# Altium PCB 6C-2L-1550um.PcbDoc (part 1 of 2)
Units mm, origin at the board's own origin, x right, y up, seen from the top; angles counter-clockwise.
Board outline 276.61 x 39.37 mm, 2 copper layers (Top Layer, Bottom Layer), stack 1.586 mm thick; 147 components, 157 nets, 749 pads, 307 vias.
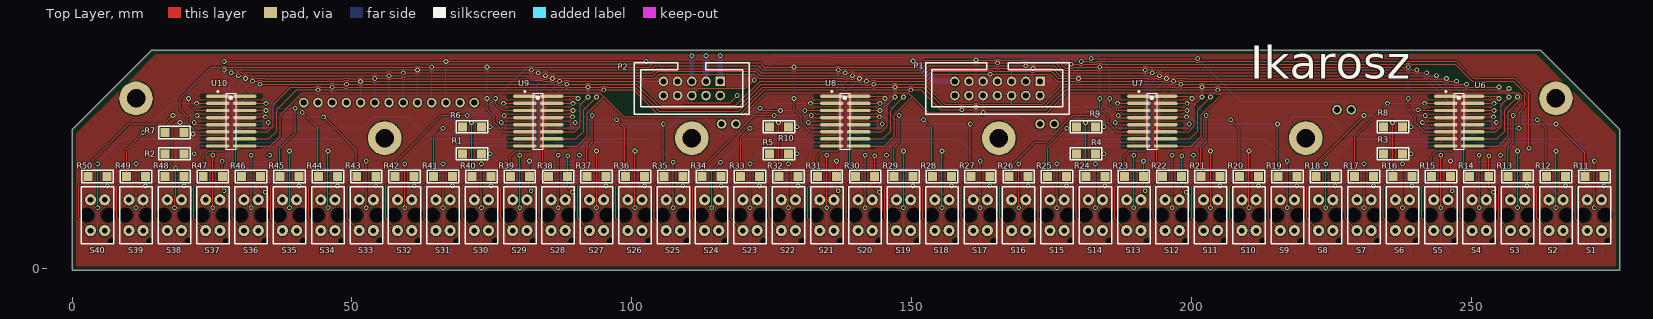
[diagram p0: Top Layer view]
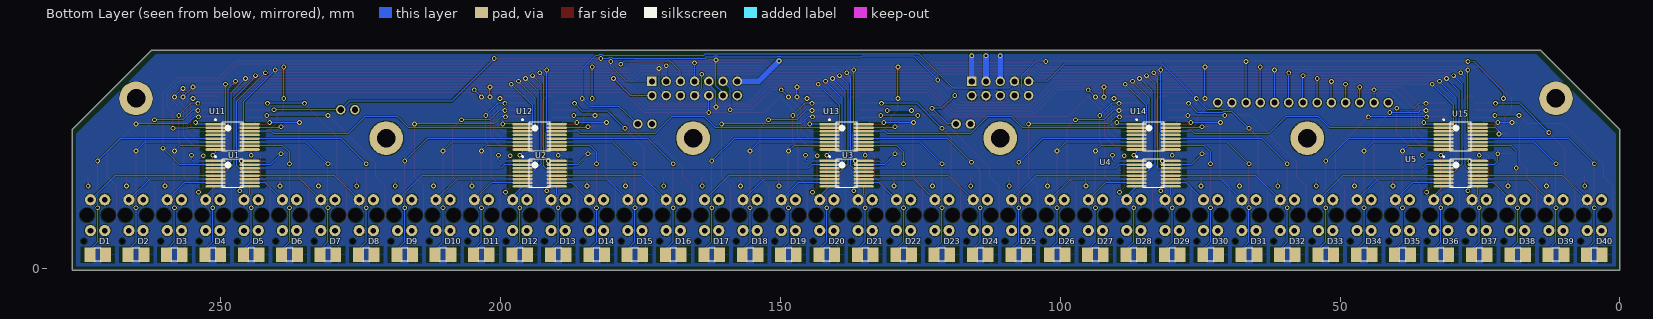
[diagram p1: Bottom Layer view, seen from below]
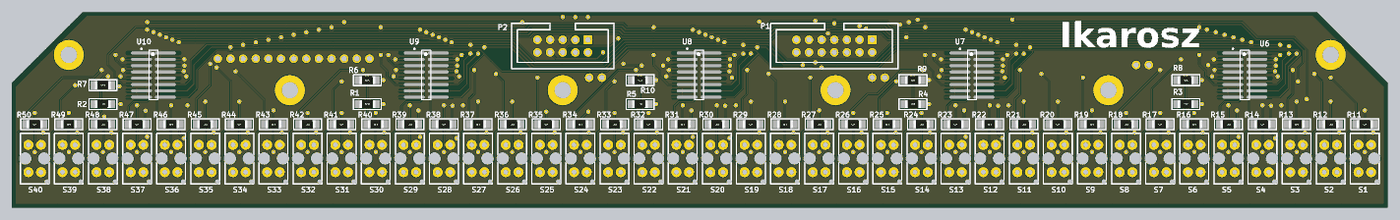
[diagram p3: 3D render of the assembled board from above, using the file's embedded part models]

## Layer stack, top to bottom
Top Solder: solder mask 0.0102, Solder Resist, Dk 3.5
Top Layer: signal copper 0.018
Dielectric1: core 1.55, FR-4, Dk 4.8
Bottom Layer: signal copper 0.018
Bottom Solder: solder mask 0.0102, Solder Resist, Dk 3.5

## Board outline
0,-0.254 276.606,-0.254 276.606,24.892 262.382,39.116 14.224,39.116 0,24.892

## Design rules (kind name [scope] priority, off if disabled: settings)
BoardOutlineClearance [All] p1: gap=0.25 ignorepadtopadclearanceinfootprint=FALSE except(0: Arc-SplitContinuation Track-SplitContinuation SMDPad-SplitContinuation THPad-SplitContinuation Via-SplitContinuation Fill-SplitContinuation Poly-SplitContinuation Region-SplitContinuation Text-SplitContinuation)
Clearance Clearance-xPP-xTP-xTT [All] p1: gap=0.15 ignorepadtopadclearanceinfootprint=FALSE except(0: Arc-Hole Track-Hole SMDPad-Hole THPad-Hole Via-Hole Fill-Hole Poly-Hole Region-Hole Text-Hole)
ComponentClearance [All] p1: gap=0.25 collisioncheckmode=3 verticalgap=0.25 showdistances=FALSE
DiffPairsRouting [All] p1: maxlimit=0.25 minlimit=0.25 mostfreqgap=0.25 toplayer_minwidth=0.381 toplayer_maxwidth=0.381 toplayer_prefwidth=0.381 bottomlayer_minwidth=0.381 bottomlayer_maxwidth=0.381 bottomlayer_prefwidth=0.381 maxuncoupledlength=12.5
Height [All] p1: minheight=0 maxheight=25 prefheight=12.5
HoleSize HoleSize-PTH [All] p1: absolutevalues=TRUE maxlimit=5 minlimit=0.25 maxpercent=80.000 minpercent=20.000
HoleToHoleClearance [All] p1: gap=0.35 allowstackedmicrovias=TRUE
MinimumAnnularRing "Minimum IAR  >0.45mm" [((ObjectKind = 'Pad') OR (ObjectKind = 'Via')) And (Layer = 'MultiLayer') And (HoleDiameter > AsMM(0.45))] p1: minimumring=0.175 // minimum inner annular ring for pads > 0.45mm finished hole size
MinimumAnnularRing "Minimum IAR <=0.45mm" [((ObjectKind = 'Pad') OR (ObjectKind = 'Via')) And (Layer = 'MultiLayer') And (HoleDiameter <= AsMM(0.45))] p2: minimumring=0.175 // minimum inner annular ring for pads <= 0.45mm finished hole size
MinimumSolderMaskSliver [All] p1: minsoldermaskwidth=0.08
PlaneClearance PlaneClearance-IPI [All] p1: clearance=0.25
PlaneConnect [All] p1: planeconnectstyle=Relief reliefexpansion=0.175 reliefentries=4 reliefconductorwidth=0.2 reliefairgap=0.2
PolygonConnect PolygonConnect-xTW [All] p1: connectstyle=Relief reliefconductorwidth=0.2 reliefentries=4 polygonreliefangle="90 Angle" airgapwidth=0.2
RoomDefinition front [InComponentClass('front')] p1: confinementstyle=ConfineIn formatcopy=TRUE lockcomponents=FALSE outline -36.322,-28.702 832.834,-28.702 832.834,90.248 -36.322,90.248
RoutingCorners [All] p1: cornerstyle=45-Degree minsetback=2.5 maxsetback=2.5
RoutingVias "RoutingVias > 0.45mm" [(ObjectKind = 'Via') And (HoleDiameter > AsMM(0.45))] p1: holewidth=0.5 width=0.85 viastyle="Through Hole" minholewidth=0.5 minwidth=0.85 maxholewidth=0.9 maxwidth=1.25 // finishet hole size > 0.45mm
RoutingVias "RoutingVias <= 0.45mm" [(ObjectKind = 'Via') And (HoleDiameter <= AsMM(0.45))] p2: holewidth=0.3 width=0.65 viastyle="Through Hole" minholewidth=0.25 minwidth=0.6 maxholewidth=0.45 maxwidth=0.8 // finishet hole size <= 0.45mm
SilkToSilkClearance [All] p1: silktosilkclearance=0.2
SilkToSolderMaskClearance SilkscreenOverComponentPads [IsPad] p1: minsilkscreentomaskgap=0.2 clearancetoexposedcopper=TRUE
SolderMaskExpansion [All] p1: expansion=0
UnRoutedNet [All] p1: checkbadconnections=TRUE
Width Width-xTW [All] p1: maxlimit=1.5 minlimit=0.15 preferedwidth=0.2
18 further rules are at their usual default settings.

## Components (designator, comment, footprint, x,y, rotation, side; value= is the part's Value field where it differs from the comment)
D1 "LED" FP_1210_LED 272.034,2.54 r0 bottom
D2 "LED" FP_1210_LED 265.176,2.54 r0 bottom
D3 "LED" FP_1210_LED 258.318,2.54 r0 bottom
D4 "LED" FP_1210_LED 251.46,2.54 r0 bottom
D5 "LED" FP_1210_LED 244.602,2.54 r0 bottom
D6 "LED" FP_1210_LED 237.744,2.54 r0 bottom
D7 "LED" FP_1210_LED 230.886,2.54 r0 bottom
D8 "LED" FP_1210_LED 224.028,2.54 r0 bottom
D9 "LED" FP_1210_LED 217.17,2.54 r0 bottom
D10 "LED" FP_1210_LED 210.312,2.54 r0 bottom
D11 "LED" FP_1210_LED 203.454,2.54 r0 bottom
D12 "LED" FP_1210_LED 196.596,2.54 r0 bottom
D13 "LED" FP_1210_LED 189.738,2.54 r0 bottom
D14 "LED" FP_1210_LED 182.88,2.54 r0 bottom
D15 "LED" FP_1210_LED 176.022,2.54 r0 bottom
D16 "LED" FP_1210_LED 169.164,2.54 r0 bottom
D17 "LED" FP_1210_LED 162.306,2.54 r0 bottom
D18 "LED" FP_1210_LED 155.448,2.54 r0 bottom
D19 "LED" FP_1210_LED 148.59,2.54 r0 bottom
D20 "LED" FP_1210_LED 141.732,2.54 r0 bottom
D21 "LED" FP_1210_LED 134.874,2.54 r0 bottom
D22 "LED" FP_1210_LED 128.016,2.54 r0 bottom
D23 "LED" FP_1210_LED 121.158,2.54 r0 bottom
D24 "LED" FP_1210_LED 114.3,2.54 r0 bottom
D25 "LED" FP_1210_LED 107.442,2.54 r0 bottom
D26 "LED" FP_1210_LED 100.584,2.54 r0 bottom
D27 "LED" FP_1210_LED 93.726,2.54 r0 bottom
D28 "LED" FP_1210_LED 86.868,2.54 r0 bottom
D29 "LED" FP_1210_LED 80.01,2.54 r0 bottom
D30 "LED" FP_1210_LED 73.152,2.54 r0 bottom
D31 "LED" FP_1210_LED 66.294,2.54 r0 bottom
D32 "LED" FP_1210_LED 59.436,2.54 r0 bottom
D33 "LED" FP_1210_LED 52.578,2.54 r0 bottom
D34 "LED" FP_1210_LED 45.72,2.54 r0 bottom
D35 "LED" FP_1210_LED 38.862,2.54 r0 bottom
D36 "LED" FP_1210_LED 32.004,2.54 r0 bottom
D37 "LED" FP_1210_LED 25.146,2.54 r0 bottom
D38 "LED" FP_1210_LED 18.288,2.54 r0 bottom
D39 "LED" FP_1210_LED 11.43,2.54 r0 bottom
D40 "LED" FP_1210_LED 4.572,2.54 r0 bottom
P1 "elso_vonalszenzorhoz" FP_CONN14 172.974,33.528 r180 top
P2 "elso_vonalszenzorhoz_anal" FP_CONN10 115.824,33.528 r180 top
R1 "1K" FP_1206_RES 71.452,20.574 r0 top
R2 "1K" FP_1206_RES 18.288,20.574 r0 top
R3 "1K" FP_1206_RES 236.044,20.574 r0 top
R4 "1K" FP_1206_RES 181.18,20.574 r0 top
R5 "1K" FP_1206_RES 126.316,20.574 r0 top
R6 "1K" FP_1206_RES 71.452,25.4 r0 top
R7 "1K" FP_1206_RES 18.288,24.384 r0 top
R8 "1K" FP_1206_RES 236.044,25.4 r0 top
R9 "1K" FP_1206_RES 181.18,25.4 r0 top
R10 "1K" FP_1206_RES 126.316,25.4 r0 top
R11 "22K" FP_1206_RES 272.034,16.51 r0 top
R12 "22K" FP_1206_RES 265.176,16.51 r0 top
R13 "22K" FP_1206_RES 258.318,16.51 r0 top
R14 "22K" FP_1206_RES 251.46,16.51 r0 top
R15 "22K" FP_1206_RES 244.602,16.51 r0 top
R16 "22K" FP_1206_RES 237.744,16.51 r0 top
R17 "22K" FP_1206_RES 230.886,16.51 r0 top
R18 "22K" FP_1206_RES 224.028,16.51 r0 top
R19 "22K" FP_1206_RES 217.17,16.51 r0 top
R20 "22K" FP_1206_RES 210.312,16.51 r0 top
R21 "22K" FP_1206_RES 203.454,16.51 r0 top
R22 "22K" FP_1206_RES 196.596,16.51 r0 top
R23 "22K" FP_1206_RES 189.738,16.51 r0 top
R24 "22K" FP_1206_RES 182.88,16.51 r0 top
R25 "22K" FP_1206_RES 176.022,16.51 r0 top
R26 "22K" FP_1206_RES 169.164,16.51 r0 top
R27 "22K" FP_1206_RES 162.306,16.51 r0 top
R28 "22K" FP_1206_RES 155.448,16.51 r0 top
R29 "22K" FP_1206_RES 148.59,16.51 r0 top
R30 "22K" FP_1206_RES 141.732,16.51 r0 top
R31 "22K" FP_1206_RES 134.874,16.51 r0 top
R32 "22K" FP_1206_RES 128.016,16.51 r0 top
R33 "22K" FP_1206_RES 121.158,16.51 r0 top
R34 "22K" FP_1206_RES 114.3,16.51 r0 top
R35 "22K" FP_1206_RES 107.442,16.51 r0 top
R36 "22K" FP_1206_RES 100.584,16.51 r0 top
R37 "22K" FP_1206_RES 93.726,16.51 r0 top
R38 "22K" FP_1206_RES 86.868,16.51 r0 top
R39 "22K" FP_1206_RES 80.01,16.51 r0 top
R40 "22K" FP_1206_RES 73.152,16.51 r0 top
R41 "22K" FP_1206_RES 66.294,16.51 r0 top
R42 "22K" FP_1206_RES 59.436,16.51 r0 top
R43 "22K" FP_1206_RES 52.578,16.51 r0 top
R44 "22K" FP_1206_RES 45.72,16.51 r0 top
R45 "22K" FP_1206_RES 38.862,16.51 r0 top
R46 "22K" FP_1206_RES 32.004,16.51 r0 top
R47 "22K" FP_1206_RES 25.146,16.51 r0 top
R48 "22K" FP_1206_RES 18.288,16.51 r0 top
R49 "22K" FP_1206_RES 11.43,16.51 r0 top
R50 "22K" FP_1206_RES 4.572,16.51 r0 top
S1 "TCRT5000" TCRT5000 270.134,9.608 r90 top
S2 "TCRT5000" TCRT5000 263.276,9.608 r90 top
S3 "TCRT5000" TCRT5000 256.418,9.608 r90 top
S4 "TCRT5000" TCRT5000 249.56,9.608 r90 top
S5 "TCRT5000" TCRT5000 242.702,9.608 r90 top
S6 "TCRT5000" TCRT5000 235.844,9.608 r90 top
S7 "TCRT5000" TCRT5000 228.986,9.608 r90 top
S8 "TCRT5000" TCRT5000 222.128,9.608 r90 top
S9 "TCRT5000" TCRT5000 215.27,9.608 r90 top
S10 "TCRT5000" TCRT5000 208.412,9.608 r90 top
S11 "TCRT5000" TCRT5000 201.554,9.608 r90 top
S12 "TCRT5000" TCRT5000 194.696,9.608 r90 top
S13 "TCRT5000" TCRT5000 187.838,9.608 r90 top
S14 "TCRT5000" TCRT5000 180.98,9.608 r90 top
S15 "TCRT5000" TCRT5000 174.122,9.608 r90 top
S16 "TCRT5000" TCRT5000 167.264,9.608 r90 top
S17 "TCRT5000" TCRT5000 160.406,9.608 r90 top
S18 "TCRT5000" TCRT5000 153.548,9.608 r90 top
S19 "TCRT5000" TCRT5000 146.69,9.608 r90 top
S20 "TCRT5000" TCRT5000 139.832,9.608 r90 top
S21 "TCRT5000" TCRT5000 132.974,9.608 r90 top
S22 "TCRT5000" TCRT5000 126.116,9.608 r90 top
S23 "TCRT5000" TCRT5000 119.258,9.608 r90 top
S24 "TCRT5000" TCRT5000 112.4,9.608 r90 top
S25 "TCRT5000" TCRT5000 105.542,9.608 r90 top
S26 "TCRT5000" TCRT5000 98.684,9.608 r90 top
S27 "TCRT5000" TCRT5000 91.826,9.608 r90 top
S28 "TCRT5000" TCRT5000 84.968,9.608 r90 top
S29 "TCRT5000" TCRT5000 78.11,9.608 r90 top
S30 "TCRT5000" TCRT5000 71.252,9.608 r90 top
S31 "TCRT5000" TCRT5000 64.394,9.608 r90 top
S32 "TCRT5000" TCRT5000 57.536,9.608 r90 top
S33 "TCRT5000" TCRT5000 50.678,9.608 r90 top
S34 "TCRT5000" TCRT5000 43.82,9.608 r90 top
S35 "TCRT5000" TCRT5000 36.962,9.608 r90 top
S36 "TCRT5000" TCRT5000 30.104,9.608 r90 top
S37 "TCRT5000" TCRT5000 23.246,9.608 r90 top
S38 "TCRT5000" TCRT5000 16.388,9.608 r90 top
S39 "TCRT5000" TCRT5000 9.53,9.608 r90 top
S40 "TCRT5000" TCRT5000 2.672,9.608 r90 top
U1 "STP08CP05TTR" TSOP65P640X120-16M 247.904,17.018 r180 bottom
U2 "STP08CP05TTR" TSOP65P640X120-16M 193.04,17.018 r180 bottom
U3 "STP08CP05TTR" TSOP65P640X120-16M 138.176,17.018 r180 bottom
U4 "STP08CP05TTR" TSOP65P640X120-16M 83.312,17.018 r180 bottom
U5 "STP08CP05TTR" TSOP65P640X120-16M 28.448,17.018 r180 bottom
U6 "4051" SO16_N 247.904,26.416 r0 top
U7 "4051" SO16_N 193.04,26.416 r0 top
U8 "4051" SO16_N 138.176,26.416 r0 top
U9 "4051" SO16_N 83.312,26.416 r0 top
U10 "4051" SO16_N 28.448,26.416 r0 top
U11 "STP08CP05TTR" TSOP65P640X120-16M 247.904,23.622 r180 bottom
U12 "STP08CP05TTR" TSOP65P640X120-16M 193.04,23.622 r180 bottom
U13 "STP08CP05TTR" TSOP65P640X120-16M 138.176,23.622 r180 bottom
U14 "STP08CP05TTR" TSOP65P640X120-16M 83.312,23.622 r180 bottom
U15 "STP08CP05TTR" TSOP65P640X120-16M 28.448,23.622 r180 bottom

## Footprints (in the part's own frame and the unit in brackets; to place one, negate y for a bottom-side part, rotate by r counter-clockwise, add the part's x,y. Pads: shape width x height; smd on the part's side, far side on the other; paste and mask are expansions set on the pad)
FP_1206_RES [mm] "1206 ellenállás"
  rect 1.6x1.6 smd: 1(-1.7,0) 2(1.7,0)
  silkscreen extent -2.8,-1.1 2.8,1.1, body extent -1.6,-0.8 1.6,0.8, height 0.62
FP_1210_LED [mm]
  rect 1.95x2.6 smd: A(-1.4,0) K(1.4,0)
  silkscreen extent -0.55,-1.2 0.55,1.2, body extent -1.7,-1.35 1.7,1.35, height 1
FP_CONN10 [mm]
  rect 1.7x1.7 hole 1.1: 1(0,0)
  round 1.7 hole 1.1: 2(0,2.54) 3(2.54,0) 4(2.54,2.54) 5(5.08,0) 6(5.08,2.54) 7(7.62,0) 8(7.62,2.54) 9(10.16,0) 10(10.16,2.54)
  silkscreen extent -5.21,-3.3 15.37,5.84
FP_CONN14 [mm]
  rect 1.7x1.7 hole 1.1: 1(0,0)
  round 1.7 hole 1.1: 2(0,2.54) 3(2.54,0) 4(2.54,2.54) 5(5.08,0) 6(5.08,2.54) 7(7.62,0) 8(7.62,2.54) 9(10.16,0) 10(10.16,2.54) 11(12.7,0) 12(12.7,2.54) 13(15.24,0) 14(15.24,2.54)
  silkscreen extent -5.21,-3.3 20.45,5.84
SO16_N [mm] "SOIC, 16-Leads, Body 9.9x3.9mm, Pitch 1.27mm, IPC Medium Density"
  oval 4.2x0.6 smd: 1(-2.4,4.445) 2(-2.4,3.175) 3(-2.4,1.905) 4(-2.4,0.635) 5(-2.4,-0.635) 6(-2.4,-1.905) 7(-2.4,-3.175) 8(-2.4,-4.445) 9(2.4,-4.445) 10(2.4,-3.175) 11(2.4,-1.905) 12(2.4,-0.635) 13(2.4,0.635) 14(2.4,1.905) 15(2.4,3.175) 16(2.4,4.445)
  silkscreen extent -2.52,-5 0.9,5.42, body extent -2,-5 2,5, height 1.75
TCRT5000 [mm]
  round 2 hole 1: 1(2.75,-0.63) 2(2.75,-3.17) 3(-2.75,-0.63) 4(-2.75,-3.17)
  round 0 hole 2.5: MH1(0,0) MH2(0,-3.8)
  round 0 hole 1: MH3(-4.65,-4.35)
  silkscreen extent -5.1,-4.8 5.1,1
TSOP65P640X120-16M [mm] "TSOP, 16-Leads, Body 5,00x4,40mm, Pitch 0,65mm, IPC Low Density"
  rect 3.6x0.45 smd: 1(-3.05,2.275)
  oval 3.6x0.45 smd: 2(-3.05,1.625) 3(-3.05,0.975) 4(-3.05,0.325) 5(-3.05,-0.325) 6(-3.05,-0.975) 7(-3.05,-1.625) 8(-3.05,-2.275) 9(3.05,-2.275) 10(3.05,-1.625) 11(3.05,-0.975) 12(3.05,-0.325) 13(3.05,0.325) 14(3.05,0.975) 15(3.05,1.625) 16(3.05,2.275)
  silkscreen extent -3.17,-2.55 1.85,3.17, body extent -2.25,-2.55 2.25,2.55, height 1.2

## Part data
D1 D2 D3 D4 D5 D6 D7 D8 D9 D10 D11 D12 D13 D14 D15 D16 D17 D18 D19 D20 D21 D22 D23 D24 D25 D26 D27 D28 D29 D30 D31 D32 D33 D34 D35 D36 D37 D38 D39 D40: "Typical RED GaAs LED", Supplier="sajat rendelesbol lesznek"
P1: library part Connector_14pin, "14pin Connector"
P2: library part Connector_10pin, "10pin Connector"
R1 R2 R3 R4 R5 R6 R7 R8 R9 R10: library part RES, "Resistor"
R11 R12 R13 R14 R15 R16 R17 R18 R19 R20 R21 R22 R23 R24 R25 R26 R27 R28 R29 R30 R31 R32 R33 R34 R35 R36 R37 R38 R39 R40 R41 R42 R43 R44 R45 R46 R47 R48 R49 R50: library part Res2, "Resistor", Name="22K0 1206 1% WR12X2202FTL 0.25W (WAL)", Reference=80-42-61, Supplier=Lomex
S1 S2 S3 S4 S5 S6 S7 S8 S9 S10 S11 S12 S13 S14 S15 S16 S17 S18 S19 S20 S21 S22 S23 S24 S25 S26 S27 S28 S29 S30 S31 S32 S33 S34 S35 S36 S37 S38 S39 S40: "Reflective Optical Sensor", Name="TCRT5000 -  Reflective Photo Interrupter, Phototransistor, Through Hole, 15 mm, 60 mA, 5 Vr, 1.25 Vf", Reference=1470066, Supplier=Farnell
U1 U2 U3 U4 U5 U11 U12 U13 U14 U15: "Low voltage, low current power 8-bit shift register"
U6 U7 U8 U9 U10: library part 74HC4051, "8:1 analog mux", Name="74HC4051D (NXP) 8-INPUT ANALOG MULTIPLEXER/DEMULTIPLEXER SO-16 MUX/DEMUX", Reference=87-05-61, Supplier=Lomex

## Free pads (board coordinates)
  round 6 hole 3.3: 3(11.43,30.48) 3(55.88,23.368) 3(110.744,23.368) 3(165.608,23.368) 3(220.472,23.368) 3(265.176,30.48)
  round 1.7 hole 1.1: 11(41.402,29.718) 11(43.942,29.718) 11(46.482,29.718) 11(49.022,29.718) 11(51.562,29.718) 11(54.102,29.718) 11(56.642,29.718) 11(59.182,29.718) 11(61.722,29.718) 11(64.262,29.718) 11(66.802,29.718) 11(69.342,29.718) 11(71.882,29.718) 11(116.078,25.908) 11(118.618,25.908) 11(172.974,25.908) 11(175.514,25.908) 11(226.06,28.448) 11(228.6,28.448)

## Via types
v1: diameter 0.85, hole 0.5, Top Layer to Bottom Layer, 307 vias

## Nets (pads, with @x,y where several pads share a name; then routed paths per layer and width w, separated by ;. In a path a pad name is that pad's centre, name@x,y a point inside that pad or via, vN(x,y) a via of type N, cw(c..) or ccw(c..) an arc to the next point about the centre after c; other vN are vias at no path point)
3V3: D1.A D2.A D3.A D4.A D5.A D6.A D7.A D8.A D9.A D10.A D11.A D12.A D13.A D14.A D15.A D16.A D17.A D18.A D19.A D20.A D21.A D22.A D23.A D24.A D25.A D26.A D27.A D28.A D29.A D30.A D31.A D32.A D33.A D34.A D35.A D36.A D37.A D38.A D39.A D40.A P1.14 P2.2 P2.4 R11.2 R12.2 R13.2 R14.2 R15.2 R16.2 R17.2 R18.2 R19.2 R20.2 R21.2 R22.2 R23.2 R24.2 R25.2 R26.2 R27.2 R28.2 R29.2 R30.2 R31.2 R32.2 R33.2 R34.2 R35.2 R36.2 R37.2 R38.2 R39.2 R40.2 R41.2 R42.2 R43.2 R44.2 R45.2 R46.2 R47.2 R48.2 R49.2 R50.2 S1.1 S2.1 S3.1 S4.1 S5.1 S6.1 S7.1 S8.1 S9.1 S10.1 S11.1 S12.1 S13.1 S14.1 S15.1 S16.1 S17.1 S18.1 S19.1 S20.1 S21.1 S22.1 S23.1 S24.1 S25.1 S26.1 S27.1 S28.1 S29.1 S30.1 S31.1 S32.1 S33.1 S34.1 S35.1 S36.1 S37.1 S38.1 S39.1 S40.1 U1.16 U2.16 U3.16 U4.16 U5.16 U6.16 U7.16 U8.16 U9.16 U11.16 U12.16 U13.16 U14.16 U15.16 | length 137.3
  Top Layer w0.2: v1(6.272,14.81) R50.2@6.272,16.51 ; v1(13.13,14.81) R49.2@13.13,16.51 ; v1(19.988,14.81) R48.2@19.988,16.51 ; v1(26.846,19.226) R47.2@26.846,16.51 26.846,14.302 v1(27.178,13.97) ; R46.2@33.704,16.51 33.704,14.556 v1(34.544,13.716) ; v1(40.562,14.81) R45.2@40.562,16.51 ; v1(47.42,14.81) R44.2@47.42,16.51 ; v1(54.278,14.81) R43.2@54.278,16.51 ; v1(61.136,14.81) R42.2@61.136,16.51 ; v1(67.994,14.81) R41.2@67.994,16.51 ; v1(74.852,14.81) R40.2@74.852,16.51 ; R39.2@81.241,16.979 81.732,16.488 v1(81.732,19.304) ; v1(82.042,13.97) 81.71,14.302 R39.2@81.71,16.51 R39.2@82.042,16.842 ; U9.16@85.712,30.861 90.043,30.861 v1(90.424,30.48) ; v1(88.568,20.242) R38.2@88.568,16.51 88.568,14.556 v1(89.408,13.716) ; v1(95.426,14.81) R37.2@95.426,16.51 ; v1(102.284,14.81) R36.2@102.284,16.51 ; v1(109.142,14.81) R35.2@109.142,16.51 ; v1(116,14.81) R34.2@116,16.51 ; v1(122.858,14.81) R33.2@122.858,16.51 ; v1(129.716,14.81) R32.2@129.716,16.51 ; v1(136.607,19.293) 136.607,16.543 R31.2@136.574,16.51 136.574,14.302 v1(136.906,13.97) ; U8.16@140.576,30.861 144.907,30.861 v1(145.288,30.48) ; v1(143.432,20.242) R30.2@143.432,16.51 143.432,14.556 v1(144.272,13.716) ; v1(150.29,14.81) R29.2@150.29,16.51 ; v1(157.148,14.81) R28.2@157.148,16.51 ; v1(164.006,14.81) R27.2@164.006,16.51 ; v1(170.864,14.81) R26.2@170.864,16.51 ; v1(177.722,14.81) R25.2@177.722,16.51 ; v1(184.58,14.81) R24.2@184.58,16.51 ; v1(191.471,19.293) 191.471,16.633 191.516,16.588 R23.2@191.438,16.51 191.438,14.302 v1(191.77,13.97) ; U7.16@195.44,30.861 199.771,30.861 v1(200.152,30.48) ; v1(198.296,20.242) R22.2@198.296,16.51 198.296,14.556 v1(199.136,13.716) ; v1(205.154,14.81) R21.2@205.154,16.51 ; v1(212.012,14.81) R20.2@212.012,16.51 ; v1(218.87,14.81) R19.2@218.87,16.51 ; v1(225.728,14.81) R18.2@225.728,16.51 ; v1(232.586,14.81) R17.2@232.586,16.51 ; v1(239.444,14.81) R16.2@239.444,16.51 ; v1(246.335,19.293) 246.335,16.633 246.38,16.588 R15.2@246.302,16.51 246.302,14.302 v1(246.634,13.97) ; U6.16@250.304,30.861 254.635,30.861 v1(255.016,30.48) ; v1(253.16,20.242) R14.2@253.16,16.51 253.16,14.556 v1(254,13.716) ; v1(260.018,14.81) R13.2@260.018,16.51 ; v1(266.876,14.81) R12.2@266.876,16.51 ; v1(273.734,14.81) R11.2@273.734,16.51
  Bottom Layer w0.2: U5.16@25.398,19.293 25.465,19.226 v1(26.846,19.226) ; U4.16@80.262,19.293 80.273,19.304 v1(81.732,19.304) ; U3.16@135.126,19.293 v1(136.607,19.293) ; U2.16@189.99,19.293 v1(191.471,19.293) ; U1.16@244.854,19.293 v1(246.335,19.293)
  Bottom Layer w1: P2.2@115.824,30.988 P2.2@116.078,30.988
ADC_CH3: P2.6 pad.11@228.6,28.448 U6.3 | length 142
  Top Layer w0.2: P2.6@110.744,30.988 112.014,32.258 120.396,32.258 v1(121.92,33.782) ; v1(182.118,37.592) v1(201.168,37.592) ; v1(240.538,28.448) 240.665,28.321 U6.3@245.504,28.321
  Bottom Layer w0.2: v1(121.92,33.782) 126.151,38.013 135.402,38.013 135.569,37.846 149.869,37.846 149.957,37.934 150.579,37.934 150.667,37.846 161.097,37.846 161.264,38.013 161.824,38.013 161.991,37.846 163.322,37.846 163.576,37.592 179.893,37.592 180.06,37.759 180.62,37.759 180.787,37.592 v1(182.118,37.592) ; v1(201.168,37.592) 208.788,29.972 227.076,29.972 pad.11@228.6,28.448 v1(240.538,28.448)
ADC_CH4: P2.7 pad.11@175.514,25.908 U7.3 | length 105.4
  Top Layer w0.2: v1(185.42,30.48) 185.42,29.464 186.563,28.321 U7.3@190.64,28.321
  Bottom Layer w0.2: P2.7@108.204,33.528 108.204,33.274 109.22,32.258 119.126,32.258 125.231,38.363 163.567,38.363 163.83,38.1 179.906,38.1 179.915,38.109 180.765,38.109 180.774,38.1 181.671,38.1 181.838,38.267 182.398,38.267 182.565,38.1 183.134,38.1 185.42,35.814 v1(185.42,30.48) 183.896,28.956 178.816,28.956 pad.11@175.514,25.908
ADC_CH5: P2.8 pad.11@118.618,25.908 U8.3 | length 35.2
  Top Layer w0.2: P2.8@108.204,30.988 109.474,29.718 117.602,29.718 v1(118.872,30.988) ; v1(122.936,28.702) 123.317,28.321 v1(126.619,28.321) ; v1(130.937,28.321) U8.3@135.776,28.321
  Bottom Layer w0.2: pad.11@118.618,25.908 120.142,25.908 v1(122.936,28.702) 121.158,28.702 v1(118.872,30.988) ; v1(126.619,28.321) v1(130.937,28.321)
ADC_CH6: P2.9 pad.11@69.342,29.718 U9.3 | length 48.2
  Top Layer w0.2: v1(75.692,30.48) 75.692,29.464 76.835,28.321 U9.3@80.912,28.321
  Bottom Layer w0.2: pad.11@69.342,29.718 70.603,28.457 71.037,28.457 71.046,28.448 73.66,28.448 v1(75.692,30.48) 81.788,36.576 99.314,36.576 102.362,33.528 P2.9@105.664,33.528
ADC_CH7: P2.10 pad.11@66.802,29.718 U10.3 | length 108.8
  Top Layer w0.2: v1(20.828,30.48) 20.828,29.464 21.971,28.321 U10.3@26.048,28.321 ; v1(27.178,37.084) v1(66.802,37.084) v1(102.616,37.084)
  Bottom Layer w0.2: v1(20.828,30.48) 20.806,31.625 22.393,33.276 26.033,37.062 v1(27.178,37.084) ; pad.11@66.802,29.718 v1(66.802,37.084) ; v1(102.616,37.084) 104.394,37.084 106.934,34.544 106.934,32.258 P2.10@105.664,30.988
EN_sensors: P1.12 pad.11@64.262,29.718 U6.6 U7.6 U8.6 U9.6 U10.6 | length 315.1
  Top Layer w0.2: U10.6@26.048,24.511 22.225,24.511 20.57,26.166 20.57,27.182 19.304,28.448 19.304,30.48 24.901,36.077 26.74,36.077 26.898,36.235 27.458,36.235 27.616,36.077 29.381,36.077 29.39,36.068 61.275,36.068 61.442,36.235 62.002,36.235 62.169,36.068 v1(64.262,36.068) v1(74.168,36.068) 81.595,36.068 81.762,36.235 82.322,36.235 82.489,36.068 82.878,36.068 82.887,36.077 103.133,36.077 103.886,36.83 122.936,36.83 123.698,36.068 v1(129.032,36.068) 136.459,36.068 136.626,36.235 137.186,36.235 137.353,36.068 137.742,36.068 137.751,36.077 151.393,36.077 152.654,37.338 v1(161.544,37.338) 164.907,37.338 165.074,37.505 165.634,37.505 165.801,37.338 170,37.338 170.009,37.347 176.013,37.347 177.459,35.901 178.842,35.901 179.009,36.068 179.906,36.068 179.915,36.059 183.633,36.059 v1(183.642,36.068) 191.323,36.068 191.49,36.235 192.05,36.235 192.217,36.068 192.606,36.068 192.615,36.077 193.465,36.077 193.474,36.068 v1(238.76,36.068) ; v1(74.168,30.48) 74.168,28.448 75.434,27.182 75.434,26.166 77.089,24.511 U9.6@80.912,24.511 ; v1(129.032,30.48) 129.032,28.448 130.298,27.182 130.298,26.166 131.953,24.511 U8.6@135.776,24.511 ; v1(183.642,30.48) 183.642,28.702 185.162,27.182 185.162,26.166 186.817,24.511 U7.6@190.64,24.511 ; v1(238.76,30.48) 238.76,28.448 240.026,27.182 240.026,26.166 241.681,24.511 U6.6@245.504,24.511
  Bottom Layer w0.2: pad.11@64.262,29.718 v1(64.262,36.068) ; v1(74.168,30.48) v1(74.168,36.068) ; v1(129.032,30.48) v1(129.032,36.068) ; P1.12@160.274,30.988 160.274,31.496 161.544,32.766 v1(161.544,37.338) ; v1(183.642,30.48) v1(183.642,36.068) ; v1(238.76,30.48) v1(238.76,36.068)
fbLED_LE: P1.8 pad.11@51.562,29.718 U11.4 U12.4 U13.4 U14.4 U15.4 | length 291.2
  Top Layer w0.2: v1(32.258,33.528) 33.081,33.528 33.248,33.695 33.808,33.695 33.984,33.519 46.039,33.519 46.057,33.537 46.907,33.537 46.925,33.519 48.575,33.519 48.742,33.686 49.302,33.686 49.469,33.519 v1(51.562,33.519) 53.655,33.519 53.822,33.352 54.382,33.352 54.558,33.528 56.199,33.528 56.217,33.51 81.292,33.51 81.617,33.835 82.584,33.835 82.742,33.677 83.882,33.677 83.891,33.686 83.99,33.686 84.157,33.519 85.007,33.519 85.016,33.528 85.405,33.528 85.572,33.361 86.132,33.361 86.299,33.528 v1(87.122,33.528) 87.945,33.528 88.112,33.695 88.672,33.695 88.839,33.528 91.768,33.528 91.777,33.537 101.083,33.537 105.41,29.21 118.618,29.21 122.945,33.537 139.003,33.537 139.021,33.519 139.871,33.519 139.88,33.528 140.269,33.528 140.436,33.361 140.996,33.361 141.163,33.528 v1(141.986,33.528) 142.809,33.528 142.976,33.695 143.536,33.695 143.712,33.519 146.623,33.519 146.641,33.537 152.663,33.537 153.924,34.798 v1(164.084,34.798) 164.093,34.789 172.129,34.789 172.138,34.798 174.752,34.798 176.022,33.528 179.385,33.528 179.552,33.361 180.112,33.361 180.279,33.528 193.876,33.528 193.885,33.519 194.735,33.519 194.744,33.528 195.133,33.528 195.3,33.361 195.86,33.361 196.027,33.528 v1(196.85,33.528) 197.673,33.528 197.84,33.695 198.4,33.695 198.567,33.528 201.496,33.528 201.505,33.537 243.397,33.537 243.415,33.519 244.265,33.519 244.283,33.537 245.162,33.537 245.338,33.361 245.898,33.361 246.074,33.537 247.387,33.537 v1(247.396,33.528)
  Bottom Layer w0.2: U15.4@31.498,23.947 30.409,23.947 29.21,25.146 29.21,30.48 v1(32.258,33.528) ; pad.11@51.562,29.718 v1(51.562,33.519) ; U14.4@86.362,23.947 85.273,23.947 84.074,25.146 84.074,30.48 v1(87.122,33.528) ; U13.4@141.226,23.947 140.137,23.947 138.938,25.146 138.938,30.48 v1(141.986,33.528) ; v1(164.084,34.798) 164.084,32.258 P1.8@165.354,30.988 ; U12.4@196.09,23.947 195.001,23.947 193.802,25.146 193.802,30.48 v1(196.85,33.528) ; v1(247.396,33.528) 248.666,32.258 248.666,25.146 249.865,23.947 U11.4@250.954,23.947
fbLED_OE: P1.7 pad.11@61.722,29.718 U11.13 U12.13 U13.13 U14.13 U15.13 | length 293.2
  Top Layer w0.2: v1(27.178,35.56) 27.187,35.569 28.01,35.569 28.168,35.727 28.728,35.727 28.886,35.569 30.651,35.569 30.66,35.56 58.744,35.56 58.902,35.718 59.462,35.718 59.62,35.56 v1(61.722,35.56) 63.815,35.56 63.982,35.393 64.542,35.393 64.709,35.56 73.721,35.56 73.888,35.393 74.448,35.393 74.615,35.56 v1(82.042,35.56) 82.051,35.569 82.874,35.569 83.032,35.727 83.592,35.727 83.75,35.569 103.387,35.569 104.14,36.322 122.682,36.322 123.444,35.56 128.585,35.56 128.752,35.393 129.312,35.393 129.479,35.56 v1(136.906,35.56) 136.915,35.569 137.738,35.569 137.896,35.727 138.456,35.727 138.614,35.569 151.647,35.569 152.908,36.83 161.097,36.83 161.264,36.663 161.824,36.663 161.991,36.83 v1(165.354,36.83) 169.987,36.83 170.154,36.997 170.714,36.997 170.881,36.83 171.27,36.83 171.279,36.839 175.759,36.839 177.047,35.551 183.168,35.551 183.186,35.569 183.362,35.393 183.922,35.393 184.089,35.56 v1(191.77,35.56) 191.779,35.569 192.602,35.569 192.76,35.727 193.32,35.727 193.478,35.569 195.243,35.569 195.252,35.56 238.313,35.56 238.48,35.393 239.04,35.393 239.207,35.56 v1(240.284,35.56)
  Bottom Layer w0.2: U15.13@25.398,23.947 26.487,23.947 27.178,24.638 v1(27.178,35.56) ; pad.11@61.722,29.718 v1(61.722,35.56) ; U14.13@80.262,23.947 81.351,23.947 82.042,24.638 v1(82.042,35.56) ; U13.13@135.126,23.947 136.215,23.947 136.906,24.638 v1(136.906,35.56) ; P1.7@165.354,33.528 v1(165.354,36.83) ; U12.13@189.99,23.947 191.079,23.947 191.77,24.638 v1(191.77,35.56) ; v1(240.284,35.56) 245.904,29.94 245.904,25.368 246.634,24.638 245.943,23.947 U11.13@244.854,23.947
fbLED_SCK: P1.6 pad.11@49.022,29.718 U11.3 U12.3 U13.3 U14.3 U15.3 | length 283.5
  Top Layer w0.2: v1(33.528,33.02) 33.537,33.011 43.499,33.011 43.517,33.029 44.367,33.029 44.385,33.011 46.026,33.011 46.202,33.187 46.762,33.187 46.938,33.011 v1(49.022,33.011) 51.115,33.011 51.282,32.844 51.842,32.844 52.009,33.011 53.668,33.011 53.677,33.002 86.268,33.002 86.286,33.02 86.675,33.02 86.842,32.853 87.402,32.853 87.569,33.02 v1(88.392,33.02) 88.401,33.029 91.764,33.029 91.922,33.187 92.482,33.187 92.64,33.029 100.829,33.029 105.156,28.702 118.872,28.702 123.199,33.029 140.273,33.029 140.291,33.011 141.141,33.011 141.15,33.02 141.539,33.02 141.706,32.853 142.266,32.853 142.433,33.02 v1(143.256,33.02) 143.265,33.011 146.61,33.011 146.786,33.187 147.346,33.187 147.522,33.011 149.417,33.011 149.435,33.029 152.391,33.029 155.956,29.464 158.57,29.464 158.579,29.473 159.429,29.473 159.438,29.464 161.097,29.464 161.264,29.631 161.824,29.631 161.991,29.464 167.894,29.464 ; P1.6@167.894,30.988 167.894,29.464 ; v1(249.174,33.02) 249.165,33.029 247.852,33.029 247.676,32.853 247.116,32.853 246.94,33.029 246.061,33.029 246.043,33.011 245.193,33.011 245.175,33.029 203.717,33.029 203.708,33.02 202.377,33.02 202.21,33.187 201.65,33.187 201.483,33.02 v1(198.12,33.02) 197.297,33.02 197.13,32.853 196.57,32.853 196.403,33.02 196.014,33.02 196.005,33.011 177.029,33.011 173.482,29.464 167.894,29.464
  Bottom Layer w0.2: U15.3@31.498,24.597 30.521,24.597 29.718,25.4 29.718,29.21 v1(33.528,33.02) ; pad.11@49.022,29.718 v1(49.022,33.011) ; U14.3@86.362,24.597 85.385,24.597 84.582,25.4 84.582,29.21 v1(88.392,33.02) ; U13.3@141.226,24.597 140.249,24.597 139.446,25.4 139.446,29.21 v1(143.256,33.02) ; U12.3@196.09,24.597 195.113,24.597 194.31,25.4 194.31,29.21 v1(198.12,33.02) ; v1(249.174,33.02) 249.174,25.4 249.977,24.597 U11.3@250.954,24.597
fbled_SDO_to_front: P1.5 U11.2 | length 111.4
  Top Layer w0.2: v1(178.562,36.576) 179.893,36.576 180.06,36.409 180.62,36.409 180.787,36.576 181.684,36.576 181.693,36.567 183.186,36.567 183.362,36.743 183.922,36.743 184.08,36.585 192.195,36.585 192.213,36.567 238.304,36.567 238.48,36.743 239.04,36.743 239.207,36.576 247.142,36.576 250.19,33.528 257.556,33.528 259.588,31.496 259.588,28.956 258.572,27.94 v1(258.572,25.146)
  Bottom Layer w0.2: P1.5@167.894,33.528 167.894,35.306 169.672,37.084 178.054,37.084 v1(178.562,36.576) ; U11.2@250.99,25.211 U11.2@250.954,25.247 255.931,25.247 256.032,25.146 v1(258.572,25.146)
GND: P1.13 P2.1 P2.3 P2.5 pad.3 pad.11@71.882,29.718 pad.11@116.078,25.908 pad.11@172.974,25.908 pad.11@226.06,28.448 R1.1 R2.1 R3.1 R4.1 R5.1 R6.1 R7.1 R8.1 R9.1 R10.1 S1.4 S2.4 S3.4 S4.4 S5.4 S6.4 S7.4 S8.4 S9.4 S10.4 S11.4 S12.4 S13.4 S14.4 S15.4 S16.4 S17.4 S18.4 S19.4 S20.4 S21.4 S22.4 S23.4 S24.4 S25.4 S26.4 S27.4 S28.4 S29.4 S30.4 S31.4 S32.4 S33.4 S34.4 S35.4 S36.4 S37.4 S38.4 S39.4 S40.4 U1.1 U2.1 U3.1 U4.1 U5.1 U6.7 U6.8 U7.7 U7.8 U8.7 U8.8 U9.7 U9.8 U10.7 U10.8 U11.1 U12.1 U13.1 U14.1 U15.1 | length 66.8
  Bottom Layer w0.2: U5.1@30.992,19.282 35.03,19.282 35.306,19.558 v1(35.306,20.32) ; U15.1@31.498,25.897 34.787,25.897 v1(35.052,26.162) v1@35.065,26.162 ; U14.1@86.362,25.897 89.651,25.897 v1(89.916,26.162) v1@89.929,26.162 ; U4.1@86.364,19.282 90.402,19.282 90.678,19.558 v1(90.678,20.32) ; U13.1@141.226,25.897 144.769,25.897 v1(144.78,25.908) ; U3.1@141.228,19.282 145.266,19.282 145.542,19.558 v1(145.542,20.32) ; U12.1@196.09,25.897 196.101,25.908 v1(199.644,25.908) ; U2.1@196.092,19.282 200.13,19.282 200.406,19.558 v1(200.406,20.32) ; U1.1@250.956,19.282 254.994,19.282 255.27,19.558 v1(255.27,20.32) ; U11.1@250.956,25.886 254.245,25.886 v1(254.521,26.162)
  Bottom Layer w1: P2.5@110.744,33.528 v1(110.744,38.1) ; P2.3@113.284,33.528 v1(113.284,38.1) ; P2.1@115.824,33.528 v1(115.824,38.1) ; v1(150.268,37.184) 153.924,33.528 P1.13@157.734,33.528
infra_LE: P1.4 pad.11@56.642,29.718 U1.4 U2.4 U3.4 U4.4 U5.4 | length 330.1
  Top Layer w0.2: v1(29.718,34.544) 29.727,34.553 30.55,34.553 30.708,34.711 31.268,34.711 31.426,34.553 33.191,34.553 33.209,34.535 51.128,34.535 51.137,34.544 51.987,34.544 51.996,34.535 53.655,34.535 53.822,34.702 54.382,34.702 54.549,34.535 v1(56.642,34.535) 56.651,34.544 58.726,34.544 58.902,34.368 59.462,34.368 59.638,34.544 61.288,34.544 61.297,34.535 62.147,34.535 62.156,34.544 81.608,34.544 81.617,34.535 82.467,34.535 82.476,34.544 82.865,34.544 83.032,34.377 83.592,34.377 83.759,34.544 v1(84.582,34.544) 84.591,34.553 85.414,34.553 85.572,34.711 86.132,34.711 86.29,34.553 103.895,34.553 104.648,35.306 122.174,35.306 122.936,34.544 136.472,34.544 136.481,34.535 137.331,34.535 137.34,34.544 137.729,34.544 137.896,34.377 138.456,34.377 138.623,34.544 v1(139.446,34.544) 139.455,34.553 140.278,34.553 140.436,34.711 140.996,34.711 141.154,34.553 152.155,34.553 153.425,35.823 164.911,35.823 164.929,35.805 165.779,35.805 165.797,35.823 169.978,35.823 170.154,35.647 170.714,35.647 170.89,35.823 175.251,35.823 176.539,34.535 179.376,34.535 179.552,34.711 180.112,34.711 180.288,34.535 192.195,34.535 192.204,34.544 192.593,34.544 192.76,34.377 193.32,34.377 193.487,34.544 v1(194.31,34.544) 194.319,34.553 195.142,34.553 195.3,34.711 195.86,34.711 196.018,34.553 197.783,34.553 197.801,34.535 241.624,34.535 241.782,34.377 242.403,34.377 242.57,34.544 v1(243.84,34.544)
  Bottom Layer w0.2: v1(29.718,34.544) 28.194,33.02 28.194,18.796 29.647,17.343 U5.4@31.498,17.343 ; pad.11@56.642,29.718 v1(56.642,34.535) ; v1(84.582,34.544) 83.058,33.02 83.058,18.796 84.511,17.343 U4.4@86.362,17.343 ; v1(139.446,34.544) 137.922,33.02 137.922,18.796 139.375,17.343 U3.4@141.226,17.343 ; P1.4@170.434,30.988 171.704,32.258 v1(171.704,35.814) ; v1(194.31,34.544) 192.786,33.02 192.786,18.796 194.239,17.343 U2.4@196.09,17.343 ; v1(243.84,34.544) 243.84,34.316 247.65,30.506 247.65,18.796 249.103,17.343 U1.4@250.954,17.343
infra_OE: P1.3 pad.11@59.182,29.718 U1.13 U2.13 U3.13 U4.13 U5.13 | length 325.5
  Top Layer w0.2: v1(28.448,35.052) 28.457,35.061 29.28,35.061 29.438,35.219 29.998,35.219 30.156,35.061 31.921,35.061 31.939,35.043 53.668,35.043 53.677,35.052 54.527,35.052 54.536,35.043 56.195,35.043 56.362,35.21 56.922,35.21 57.089,35.043 v1(59.182,35.043) 61.284,35.043 61.442,34.885 62.002,34.885 62.16,35.043 74.593,35.043 74.602,35.052 81.595,35.052 81.762,34.885 82.322,34.885 82.489,35.052 v1(83.312,35.052) 83.321,35.061 84.144,35.061 84.302,35.219 84.862,35.219 85.02,35.061 103.641,35.061 104.394,35.814 122.428,35.814 123.199,35.043 129.457,35.043 129.466,35.052 136.459,35.052 136.626,34.885 137.186,34.885 137.353,35.052 v1(138.176,35.052) 138.185,35.061 139.008,35.061 139.166,35.219 139.726,35.219 139.884,35.061 151.901,35.061 153.162,36.322 161.11,36.322 161.119,36.313 161.969,36.313 161.978,36.322 164.907,36.322 165.074,36.155 165.634,36.155 165.801,36.322 v1(170.434,36.322) 171.257,36.322 171.424,36.489 171.984,36.489 172.151,36.322 175.514,36.322 176.793,35.043 179.389,35.043 179.407,35.061 180.257,35.061 180.275,35.043 184.067,35.043 184.076,35.052 191.323,35.052 191.49,34.885 192.05,34.885 192.217,35.052 v1(193.04,35.052) 193.049,35.061 193.872,35.061 194.03,35.219 194.59,35.219 194.748,35.061 196.513,35.061 196.531,35.043 239.185,35.043 239.194,35.052 239.837,35.052 240.004,34.885 240.564,34.885 240.731,35.052 v1(242.062,35.052)
  Bottom Layer w0.2: U5.13@25.398,17.343 26.599,17.343 27.686,18.43 27.686,34.29 v1(28.448,35.052) ; pad.11@59.182,29.718 v1(59.182,35.043) ; U4.13@80.262,17.343 81.798,17.343 82.55,18.095 82.55,34.29 v1(83.312,35.052) ; U3.13@135.126,17.343 136.327,17.343 137.414,18.43 137.414,34.29 v1(138.176,35.052) ; P1.3@170.434,33.528 v1(170.434,36.322) ; U2.13@189.99,17.343 191.272,17.343 192.278,18.349 192.278,34.29 v1(193.04,35.052) ; v1(242.062,35.052) 247.142,29.972 247.142,18.43 246.055,17.343 U1.13@244.854,17.343
infra_SCK: P1.2 pad.11@54.102,29.718 U1.3 U2.3 U3.3 U4.3 U5.3 | length 325.8
  Top Layer w0.2: v1(30.988,34.036) 30.997,34.045 31.82,34.045 31.978,34.203 32.538,34.203 32.696,34.045 34.461,34.045 34.479,34.027 48.588,34.027 48.597,34.036 49.447,34.036 49.456,34.027 51.115,34.027 51.282,34.194 51.842,34.194 52.009,34.027 v1(54.102,34.027) 54.111,34.036 56.186,34.036 56.362,33.86 56.922,33.86 57.098,34.036 58.739,34.036 58.757,34.018 81.305,34.018 81.472,34.185 82.612,34.185 82.621,34.194 82.72,34.194 82.887,34.027 83.737,34.027 83.746,34.036 84.135,34.036 84.302,33.869 84.862,33.869 85.029,34.036 v1(85.852,34.036) 85.861,34.045 86.684,34.045 86.842,34.203 87.402,34.203 87.56,34.045 104.149,34.045 104.902,34.798 121.92,34.798 122.682,34.036 137.742,34.036 137.751,34.027 138.601,34.027 138.61,34.036 138.999,34.036 139.166,33.869 139.726,33.869 139.893,34.036 v1(140.716,34.036) 140.725,34.045 141.548,34.045 141.706,34.203 142.266,34.203 142.424,34.045 152.409,34.045 153.67,35.306 163.637,35.306 163.804,35.473 164.364,35.473 164.54,35.297 170.859,35.297 170.868,35.306 171.257,35.306 171.424,35.139 171.984,35.139 172.151,35.306 175.006,35.306 176.276,34.036 v1(179.832,34.036) 192.191,34.036 192.2,34.027 193.465,34.027 193.474,34.036 193.863,34.036 194.03,33.869 194.59,33.869 194.757,34.036 v1(195.58,34.036) 195.589,34.045 196.412,34.045 196.57,34.203 197.13,34.203 197.288,34.045 199.053,34.045 199.071,34.027 243.402,34.027 243.56,33.869 244.12,33.869 244.278,34.027 245.609,34.027 v1(245.618,34.036)
  Bottom Layer w0.2: v1(30.988,34.036) 28.702,31.75 28.702,19.304 30.013,17.993 U5.3@31.498,17.993 ; pad.11@54.102,29.718 v1(54.102,34.027) ; v1(85.852,34.036) 83.566,31.75 83.566,19.304 84.877,17.993 U4.3@86.362,17.993 ; v1(140.716,34.036) 138.43,31.75 138.43,19.304 139.741,17.993 U3.3@141.226,17.993 ; P1.2@172.974,30.988 176.784,30.988 v1(179.832,34.036) ; v1(195.58,34.036) 193.294,31.75 193.294,19.304 194.605,17.993 U2.3@196.09,17.993 ; v1(245.618,34.036) 248.158,31.496 248.158,19.304 249.469,17.993 U1.3@250.954,17.993
infra_SDO_to_front: P1.1 U1.2 | length 112.4
  Top Layer w0.2: v1(180.34,37.084) 181.671,37.084 181.838,36.917 183.041,36.917 183.217,37.093 200.712,37.093 200.888,36.917 201.448,36.917 201.624,37.093 247.387,37.093 250.444,34.036 257.81,34.036 260.35,31.496 v1(260.35,21.59)
  Bottom Layer w0.2: P1.1@172.974,33.528 177.546,33.528 180.34,36.322 v1(180.34,37.084) ; U1.2@250.954,18.643 250.968,18.629 257.389,18.629 v1(260.35,21.59)
NetD1_2: D1.K U11.5 | length 40.1
  Top Layer w0.2: v1(272.034,10.922) v1(272.034,19.304)
  Bottom Layer w0.2: U11.5@250.954,23.297 268.041,23.297 v1(272.034,19.304) ; v1(272.034,10.922) 272.034,4.826 273.434,3.426 D1.K@273.434,2.54
NetD2_2: D2.K U11.6 | length 34
  Top Layer w0.2: v1(265.176,10.922) v1(265.176,21.082)
  Bottom Layer w0.2: U11.6@250.954,22.647 263.611,22.647 v1(265.176,21.082) ; v1(265.176,10.922) 265.176,4.826 266.576,3.426 D2.K@266.576,2.54
NetD3_2: D3.K U11.7 | length 26.9
  Top Layer w0.2: v1(258.318,10.922) v1(258.318,21.082)
  Bottom Layer w0.2: U11.7@250.954,21.997 257.403,21.997 v1(258.318,21.082) ; v1(258.318,10.922) 258.318,4.826 259.718,3.426 D3.K@259.718,2.54
NetD4_2: D4.K U11.8 | length 19.6
  Top Layer w0.2: v1(251.46,10.922) v1(251.46,20.32)
  Bottom Layer w0.2: U11.8@250.954,21.347 250.954,20.826 v1(251.46,20.32) ; v1(251.46,10.922) 251.46,4.826 252.86,3.426 D4.K@252.86,2.54
NetD5_2: D5.K U11.9 | length 19.5
  Top Layer w0.2: v1(244.602,10.922) v1(244.602,20.32)
  Bottom Layer w0.2: v1(244.602,10.922) 244.602,4.826 246.002,3.426 D5.K@246.002,2.54 ; v1(244.602,20.32) 244.602,21.095 U11.9@244.854,21.347
NetD6_2: D6.K U11.10 | length 26.5
  Top Layer w0.2: v1(237.744,10.922) v1(237.744,18.796)
  Bottom Layer w0.2: v1(237.744,10.922) 237.744,4.826 239.144,3.426 D6.K@239.144,2.54 ; v1(237.744,18.796) 237.744,20.828 238.913,21.997 U11.10@244.854,21.997